# Altium PCB MCU.PcbDoc
Units mm, origin at the board's own origin, x right, y up, seen from the top; angles counter-clockwise.
Board outline 47.6 x 56 mm, 2 copper layers (Top Layer, Bottom Layer), stack 1.591 mm thick; 47 components, 57 nets, 217 pads, 69 vias.
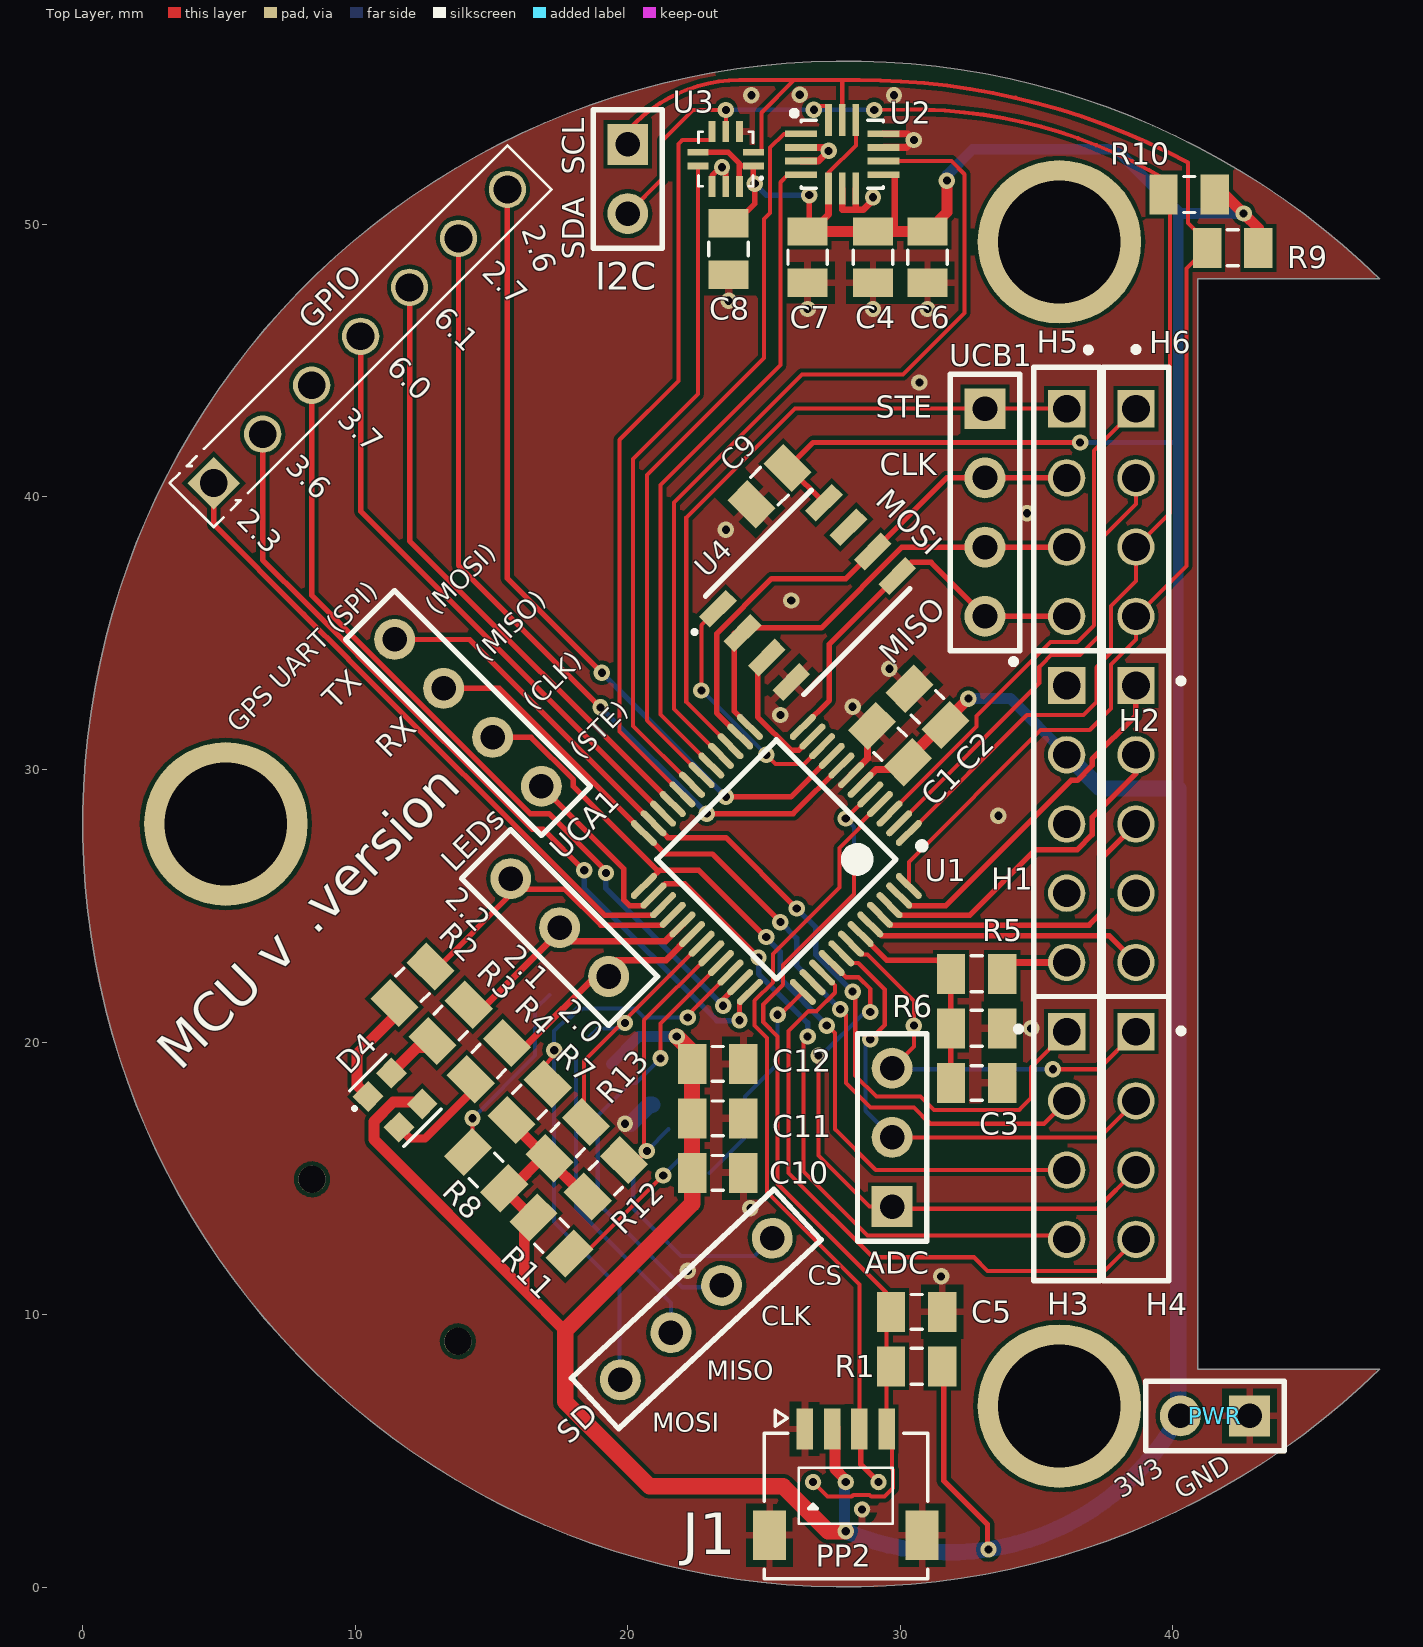
[diagram p0: Top Layer view]
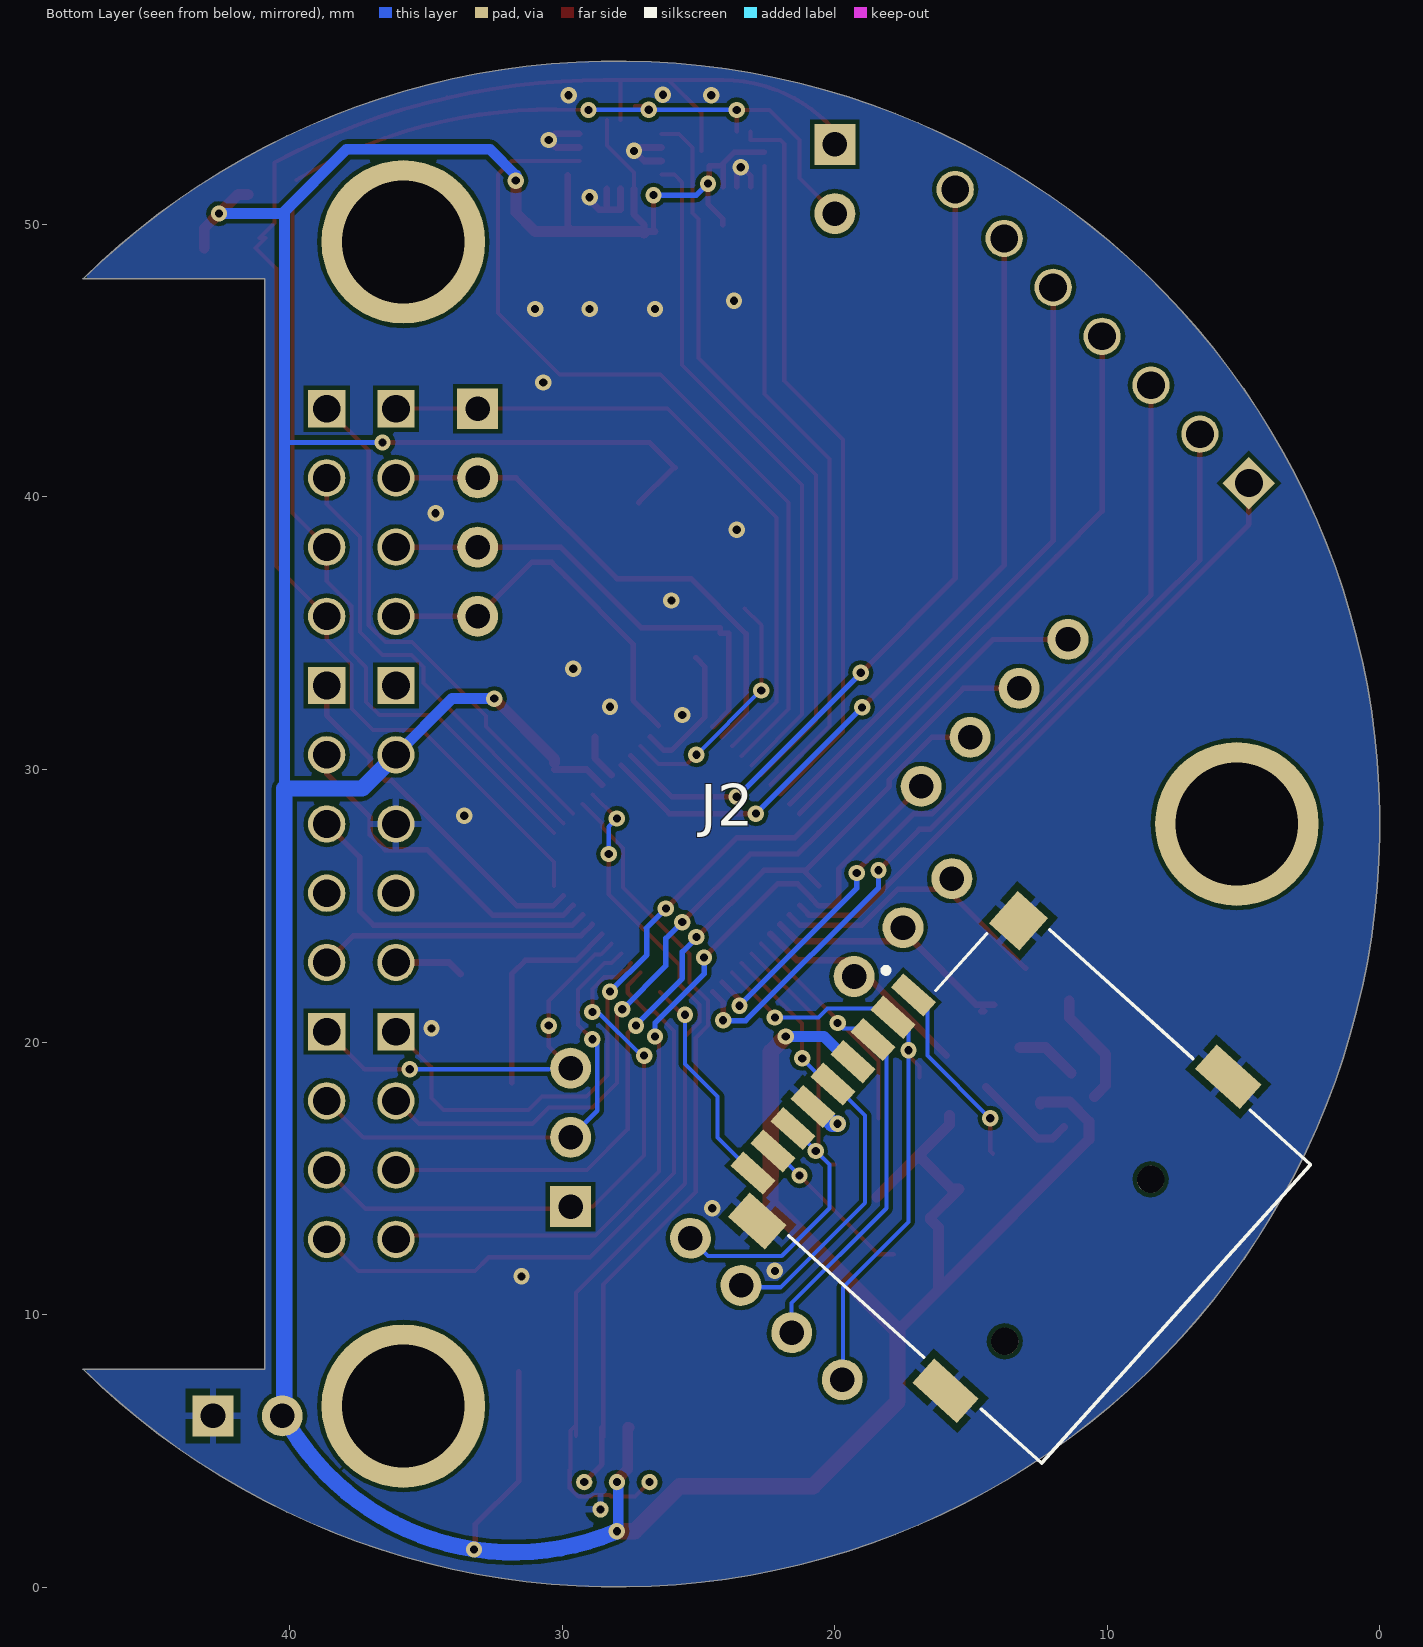
[diagram p1: Bottom Layer view, seen from below]
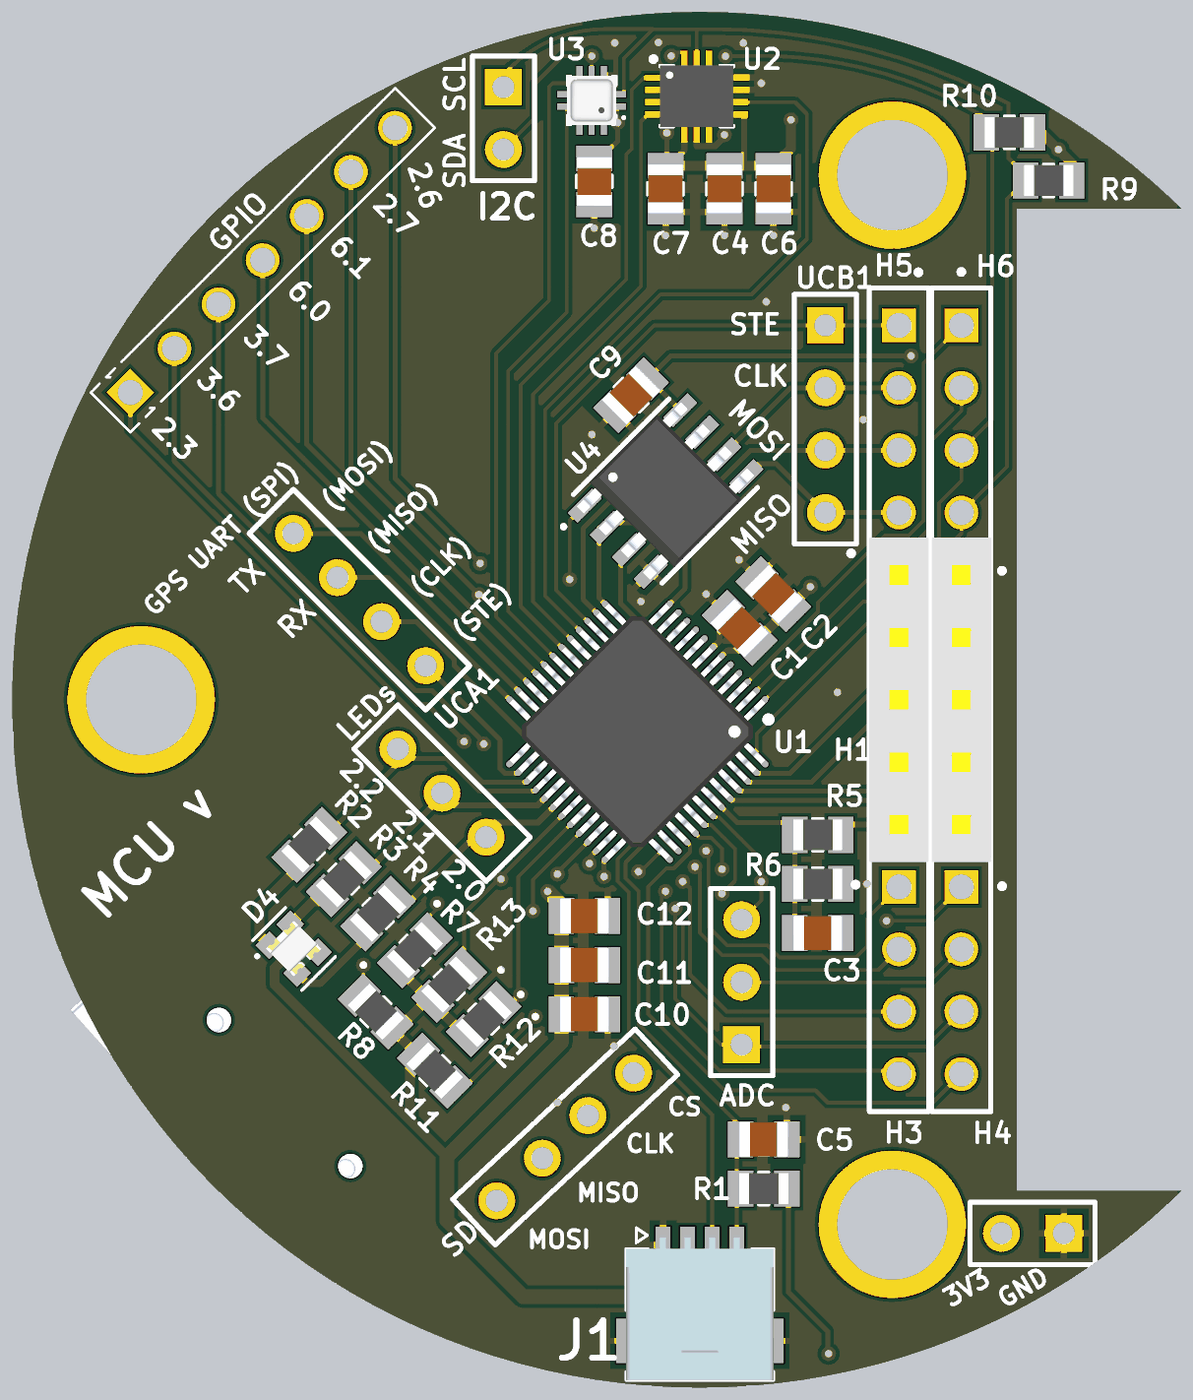
[diagram p2: 3D render of the assembled board from above, using the file's embedded part models]

## Layer stack, top to bottom
Top Solder: solder mask 0.0102, Solder Resist, Dk 3.5
Top Layer: signal copper 0.0356
Dielectric 1: dielectric 1.52, FR-4, Dk 4.8
Bottom Layer: signal copper 0.0356
Bottom Solder: solder mask 0.0102, Solder Resist, Dk 3.5

## Board outline
47.596,8 cw(c28,28) 47.596,48 47.6,48 40.913,48 40.913,8

## Design rules (kind name [scope] priority, off if disabled: settings)
Clearance [All] p1: gap=0.152 ignorepadtopadclearanceinfootprint=FALSE
HoleSize [All] p1: absolutevalues=TRUE maxlimit=6.2 minlimit=0.3 maxpercent=80.000 minpercent=20.000
MinimumAnnularRing [All] p1: minimumring=0.15
MinimumSolderMaskSliver [All] p1: minsoldermaskwidth=0.1
PolygonConnect ViaConnect [IsVia] p1: connectstyle=Direct reliefconductorwidth=0.254 reliefentries=4 polygonreliefangle="90 Angle" airgapwidth=0.254
PolygonConnect [All] p2: connectstyle=Relief reliefconductorwidth=0.254 reliefentries=4 polygonreliefangle="90 Angle" airgapwidth=0.254
RoutingVias [All] p1: holewidth=0.3 width=0.6 viastyle="Through Hole" minholewidth=0.3 minwidth=0.5 maxholewidth=1 maxwidth=5
SilkToSilkClearance [All] p1: silktosilkclearance=0.1
SilkToSolderMaskClearance [IsPad] p1: minsilkscreentomaskgap=0.1 clearancetoexposedcopper=TRUE
SolderMaskExpansion [All] p1: expansion=0.051 istentingtop=FALSE
Width [All] p1: maxlimit=25.4 minlimit=0.15 preferedwidth=0.3
26 further rules are at their usual default settings.

## Components (designator, comment, footprint, x,y, rotation, side; value= is the part's Value field where it differs from the comment)
ADC "Header 3" HDR1X3#1 29.7,13.96 r90 top
C1 "100nF" CAPACITOR_0805_2012M-70N 29.621,30.928 r315 top
C2 "22uF" CAPACITOR_0805_2012M-70N 31,32.3 r315 top
C3 "100nF" CAPACITOR_0805_2012M-70N 32.8,18.5 r180 top
C4 "0.1uF" CAPACITOR_0805_2012M-70N 29,48.8 r90 top
C5 "1nF" CAPACITOR_0805_2012M-70N 30.6,10.1 r180 top
C6 "2.2 uF" CAPACITOR_0805_2012M-70N 31,48.8 r90 top
C7 "10 nF" CAPACITOR_0805_2012M-70N 26.6,48.8 r90 top
C8 "0.1uF" CAPACITOR_0805_2012M-70N 23.7,49.1 r90 top
C9 "0.1uF" CAPACITOR_0805_2012M-70N 25.2,40.4 r45 top
C10 "22uF" CAPACITOR_0805_2012M-70N 23.3,15.2 r180 top
C11 "22uF" CAPACITOR_0805_2012M-70N 23.3,17.2 r180 top
C12 "22uF" CAPACITOR_0805_2012M-70N 23.3,19.2 r180 top
D4 "B38G3RGB-10D0003H2U1930" LED_B38G3RGB-10D0003H2U1930_0606_1616M 11.465,17.865 r45 top
GPIO "HDR,2.54mm,1x7" HEADER_2.54MM_1x7PIN 10.196,45.896 r45 top
H1 "SSQ-105-03-S-S" SAMTEC_SSQ-105-03-S-S 36.107,28 r270 top
H2 "SSQ-105-03-S-S" SAMTEC_SSQ-105-03-S-S 38.647,28 r270 top
H3 "SSQ-104-02-S-S" *SAMTEC_SSQ-104-02-S-S_SSQ-104-02-S-S(Primary) 36.107,16.57 r270 top
H4 "SSQ-104-02-S-S" *SAMTEC_SSQ-104-02-S-S_SSQ-104-02-S-S(Primary) 38.647,16.57 r270 top
H5 "SSQ-104-02-S-S" *SAMTEC_SSQ-104-02-S-S_SSQ-104-02-S-S(Primary) 36.107,39.43 r270 top
H6 "SSQ-104-02-S-S" *SAMTEC_SSQ-104-02-S-S_SSQ-104-02-S-S(Primary) 38.647,39.43 r270 top
I2C "" HDR1X2 20,52.94 r270 top
J1 "5015680407" MOLEX_5015680407 28,3.25 r0 top
J2 "MSD-4-A" CUI_MSD-4-A 12.869,14.869 r132 bottom
LEDs "Header 3" HDR1X3#2 15.704,25.996 r315 top
PP2 "Headerless Pogo Holes 4-pin" POGO_4_PIN_HEADER 28,3.35 r0 top
PWR "" HDR1X2 42.82,6.278 r180 top
R1 "47k" RESISTOR_0805_2012M-50N 30.6,8.1 r0 top
R2 "4.7k" RESISTOR_0805_2012M-50N 12.1,22.1 r225 top
R3 "4.7k" RESISTOR_0805_2012M-50N 13.5,20.7 r225 top
R4 "4.7k" RESISTOR_0805_2012M-50N 14.9,19.3 r225 top
R5 "47k" RESISTOR_0805_2012M-50N 32.8,22.5 r0 top
R6 "47k" RESISTOR_0805_2012M-50N 32.8,20.5 r180 top
R7 "4.7k" Resistor_0805_2012M-50N 16.397,17.8 r225 top
R8 "4.7k" Resistor_0805_2012M-50N 14.8,15.3 r315 top
R9 "4.7k" RESISTOR_0805_2012M-50N 42.2,49.139 r0 top
R10 "4.7k" RESISTOR_0805_2012M-50N 40.6,51.1 r0 top
R11 "4.7k" Resistor_0805_2012M-50N 17.2,12.9 r135 top
R12 "4.7k" Resistor_0805_2012M-50N 19.197,15 r225 top
R13 "4.7k" Resistor_0805_2012M-50N 17.797,16.4 r225 top
SD "Header 4" HDR1X4#1 19.727,7.603 r43 top (schematic designator UCA0)
U1 "MSP430FR2355TPT" PT0048A_L 25.452,26.7 r225 top
U2 "ICM-42670-P" XDCR_ICM-42670-P-EXTENDED_PADS 27.869,52.576 r0 top
U3 "BMP390" BMP390 23.595,52.4 r270 top
U4 "MX25V16066M1I02" "SOIC-8 MX25V16066M1I02" 26.6,36.5 r45 top
UCA1 "Header 4" HDR1X4#1 16.833,29.383 r135 top locked
UCB1 "Header 4" HDR1X4#2 33.109,43.24 r270 top

## Footprints (in the part's own frame and the unit in brackets; to place one, negate y for a bottom-side part, rotate by r counter-clockwise, add the part's x,y. Pads: shape width x height; smd on the part's side, far side on the other; paste and mask are expansions set on the pad)
*SAMTEC_SSQ-104-02-S-S_SSQ-104-02-S-S(Primary) [mm]
  rect 1.37x1.37 hole 1.02: 01(-3.81,0)
  round 1.37 hole 1.02: 02(-1.27,0) 03(1.27,0) 04(3.81,0)
  silkscreen extent -5.34,-1.87 5.34,1.2
BMP390 [mm]
  rect 0.25x0.775 smd: 1(0.25,1.013) 2(-0.25,1.013) 6(-0.25,-1.013) 7(0.25,-1.013)
  rect 0.775x0.25 smd: 3(-1.013,0.5) 4(-1.013,0) 5(-1.013,-0.5) 8(1.013,-0.5) 9(1.013,0) 10(1.013,0.5)
  silkscreen extent -1,-1 1,1.36, body extent -1,-1 1,1, height 0.8
CAPACITOR_0805_2012M-70N [mm] "Capacitor, 0805 (2012 metric), 0.7mm high, nominal pads,"
  rect 1.04x1.47 smd mask+0.051: 1(-0.94,0) 2(0.94,0)
  silkscreen extent -0.2,-0.63 0.2,0.63, body extent -1,-0.73 1,0.73, height 1.23
CUI_MSD-4-A [mm]
  rect 0.7x1.6 smd: 1(2.25,7.75) 2(1.15,7.75) 3(0.05,7.75) 4(-1.05,7.75) 5(-2.15,7.75) 6(-3.25,7.75) 7(-4.35,7.75) 8(-5.45,7.75) CD(-6.55,7.75)
  rect 1.2x1.8 smd: G1(-7.75,6.45)
  rect 1.6x1.5 smd: G2(6.85,6.7)
  rect 1.2x2.2 smd: G3(-7.75,-2.85) G4(7.75,-2.85)
  round 1 hole 1 unplated: ""(-4.95,-3.25) ""(3.05,-3.25)
  silkscreen extent -7.38,-7.25 7.37,9.2, body extent -8.05,-7.47 8.1,7.58, height 1.8
HDR1X2 [mm] "Connector; Header; 2 Position"
  rect 1.5x1.5 hole 0.9: 1(0,0)
  round 1.5 hole 0.9: 2(2.54,0)
  silkscreen extent -1.27,-1.27 3.81,1.27
HDR1X3#1 [mm] "Connector; Header; 3 Position"
  rect 1.5x1.5 hole 0.9: 1(0,0)
  round 1.5 hole 0.9: 2(2.54,0) 3(5.08,0)
  silkscreen extent -1.27,-1.27 6.35,1.27
HDR1X3#2 [mm] "Connector; Header; 3 Position"
  round 1.5 hole 0.9: 1(0,0) 2(2.54,0) 3(5.08,0)
  silkscreen extent -1.27,-1.27 6.35,1.27
HDR1X4#1 [mm] "Connector; Header; 4 Position"
  round 1.5 hole 0.9: 1(0,0) 2(2.54,0) 3(5.08,0) 4(7.62,0)
  silkscreen extent -1.27,-1.27 8.89,1.27
HDR1X4#2 [mm] "Connector; Header; 4 Position"
  rect 1.5x1.5 hole 0.9: 1(0,0)
  round 1.5 hole 0.9: 2(2.54,0) 3(5.08,0) 4(7.62,0)
  silkscreen extent -1.27,-1.27 8.89,1.27
HEADER_2.54MM_1x7PIN [mm]
  rect 1.37x1.37 hole 1.02: 1(-7.62,0)
  round 1.37 hole 1.02: 2(-5.08,0) 3(-2.54,0) 4(0,0) 5(2.54,0) 6(5.08,0) 7(7.62,0)
  silkscreen extent -8.76,-1.14 8.76,1.14
LED_B38G3RGB-10D0003H2U1930_0606_1616M [mm] "RGB LED, 0606 (1616 metric), 0.4mm high"
  rect 0.813x0.8 smd mask+0.051: 1(-0.602,0.8) 2(0.602,0.8) 3(0.602,-0.8) 4(-0.602,-0.8)
  silkscreen extent -1.3,-1.42 0.97,1.42, body extent -0.8,-0.8 0.8,0.8, height 0.4
MOLEX_5015680407 [mm] "Header - Picoclasp 04-pin, SMT, RA, 3.2mm height"
  rect 0.6x1.5 smd mask+0.076: 1(-1.5,2.55) 2(-0.5,2.55) 3(0.5,2.55) 4(1.5,2.55)
  rect 1.2x1.8 smd mask+0.076: MP1(2.8,-1.35) MP2(-2.8,-1.35)
  silkscreen extent -3,-2.95 3,3.25, body extent -3,-2.95 3,2.95, height 3.19
POGO_4_PIN_HEADER [mm] "4-pin header for pogo pins"
  round 0.6 hole 0.3 mask+0.051: 1(-1.2,0.5) 2(0,0.5) 3(0.6,-0.5) 4(1.2,0.5)
  silkscreen extent -1.73,-1.02 1.72,1.03
PT0048A_L [mm]
  oval 1.25x0.25 smd paste+0 mask+0.051: 1(-4.125,2.75) 2(-4.125,2.25) 3(-4.125,1.75) 4(-4.125,1.25) 5(-4.125,0.75) 6(-4.125,0.25) 7(-4.125,-0.25) 8(-4.125,-0.75) 9(-4.125,-1.25) 10(-4.125,-1.75) 11(-4.125,-2.25) 12(-4.125,-2.75) 25(4.125,-2.75) 26(4.125,-2.25) 27(4.125,-1.75) 28(4.125,-1.25) 29(4.125,-0.75) 30(4.125,-0.25) 31(4.125,0.25) 32(4.125,0.75) 33(4.125,1.25) 34(4.125,1.75) 35(4.125,2.25) 36(4.125,2.75)
  oval 0.25x1.25 smd paste+0 mask+0.051: 13(-2.75,-4.125) 14(-2.25,-4.125) 15(-1.75,-4.125) 16(-1.25,-4.125) 17(-0.75,-4.125) 18(-0.25,-4.125) 19(0.25,-4.125) 20(0.75,-4.125) 21(1.25,-4.125) 22(1.75,-4.125) 23(2.25,-4.125) 24(2.75,-4.125) 37(2.75,4.125) 38(2.25,4.125) 39(1.75,4.125) 40(1.25,4.125) 41(0.75,4.125) 42(0.25,4.125) 43(-0.25,4.125) 44(-0.75,4.125) 45(-1.25,4.125) 46(-1.75,4.125) 47(-2.25,4.125) 48(-2.75,4.125)
  silkscreen extent -4.25,-3.1 3.1,3.55, body extent -4.5,-4.5 4.5,4.5, height 1.6
RESISTOR_0805_2012M-50N [mm] "Resistor, 0805 (2012 metric), nominal pads"
  rect 1.04x1.47 smd mask+0.051: 1(-0.94,0) 2(0.94,0)
  silkscreen extent -0.2,-0.66 0.2,0.66, body extent -1,-0.63 1,0.62, height 0.5
Resistor_0805_2012M-50N [mm] "Resistor, 0805 (2012 metric), nominal pads"
  rect 1.04x1.47 smd mask+0.051: 1(-0.94,0) 2(0.94,0)
  silkscreen extent -0.2,-0.66 0.2,0.66, body extent -1,-0.62 1,0.63, height 0.5
SAMTEC_SSQ-105-03-S-S [mm]
  rect 1.37x1.37 / inner round 1.37 / far side rect 1.37x1.37 hole 1.02: 1(-5.08,0)
  round 1.37 hole 1.02: 2(-2.54,0) 3(0,0) 4(2.54,0) 5(5.08,0)
  silkscreen extent -6.36,-2.05 6.33,1.2, body extent -6.6,-1.21 6.6,1.21, height 8.51
"SOIC-8 MX25V16066M1I02" [mm] "SD Card, SPI, 8-SOP footprint"
  rect 1.4x0.57 smd mask+0.051: 1(-2.75,1.905) 2(-2.75,0.635) 3(-2.75,-0.635) 4(-2.75,-1.905) 5(2.75,1.905) 6(2.75,0.635) 7(2.75,-0.635) 8(2.75,-1.905)
  silkscreen extent -3.99,-2.55 2.75,2.55, body extent -3,-2.45 3,2.45, height 1.75
XDCR_ICM-42670-P-EXTENDED_PADS [mm]
  rect 1.175x0.25 smd paste-1 mask+0.05: 1(-1.512,0.75) 2(-1.512,0.25) 3(-1.512,-0.25) 4(-1.512,-0.75) 8(1.512,-0.75) 9(1.512,-0.25) 10(1.512,0.25) 11(1.512,0.75)
  rect 0.25x1.175 smd paste-1 mask+0.05: 5(-0.5,-1.262) 6(0,-1.262) 7(0.5,-1.262) 12(0.5,1.262) 13(0,1.262) 14(-0.5,1.262)
  silkscreen extent -1.86,-1.25 1.5,1.6, body extent -1.5,-1.25 1.5,1.25, height 0.81

## Part data
ADC LEDs: "Header, 3-Pin"
C1 C3: library part "Generic Capacitor", "Generic Capacitor", Capacitance at Rated Voltage=40%, MF Part No.=C0805C104K5RAC7800, Package=0805, Rated Voltage=50V, Supplier 1 Part No.=399-C0805C104K5RAC7800CT-ND, Temperature Coefficient=X7R, Temp Range="-55°C ~ 125°C", Tolerance=±10%, Supplier 1=Digikey
C2: library part C0805C226M9PACTU, "Passive - Capacitor, X5R, 22uF Max, 6.3V, 0805 (2012 Metric), ±20%, -55°C ~ 85°C. 8.8uF @ 5V", Capacitance at Rated Voltage=30%, Package=0402, Rated Voltage=6.3V, Supplier 1 Part No.=399-C0805C226M9PAC7800CT-ND, Temperature Coefficient=X5R, Temp Range="-55°C ~ 85°C", Tolerance=±20%, APSS Standard Part="APSS Standard", MF Part No.=C0805C226M9PACTU, Supplier 1=Digikey
C4 C6 C7 C8 C9: library part "Generic Capacitor", "Generic Capacitor", Capacitance at Rated Voltage=40%, MF Part No.=C0805C104K5RAC7800, Package=0805, Rated Voltage=50V, Supplier 1 Part No.=399-C0805C104K5RAC7800CT-ND, Temp Range="-55°C ~ 125°C", Temperature Coefficient=X7R, Tolerance=±10%, Supplier 1=Digikey
C5: library part "Generic Capacitor", "Generic Capacitor", Capacitance at Rated Voltage=100%, MF Part No.=399-C0805C102J5GAC7800CT-ND, Package=0805, Rated Voltage=50V, Temperature Coefficient=X7R, Temp Range="-55°C ~ 125°C", Tolerance=±5%, Supplier 1=Digikey, Supplier 1 Part No.=399-C0805C102J5GAC7800CT-ND
C10 C11 C12: library part GRM21BR61C226ME44L, "Passive - Capacitor, X5R, 22uF Max, 16V, 0805 (2012 Metric), ±20%, -55°C ~ 85°C. 9.4uF @ 5V, 3.2uF @ 15V, 1.9uF @ 25V", Capacitance at Rated Voltage=10%, Package=0805, Rated Voltage=16V, Supplier 1 Part No.=490-10747-1-ND, Temperature Coefficient=X5R, Temp Range="-55°C ~ 85°C", Tolerance=±20%, APSS Standard Part="APSS Standard", MF Part No.=GRM21BR61C226ME44L, Supplier 1=Digikey
D4: "Diode - LED, RGB, 2V Red, 3V Green, 3V Blue 0606 (1616 Metric)", Package=0606, Supplier 1 Part No.=3147-B38G3RGB-10D0003H2U1930CT-ND, Temp Range="-40°C ~ 85°C", APSS Standard Part="APSS Standard", MF Part No.=B38G3RGB-10D0003H2U1930, Supplier 1=Digikey
GPIO: "Connector - 2.54mm, 1x7-pin"
I2C PWR: library part "Header 2", "Header, 2-Pin"
J1: "Connector - Picoclasp  04-pin, SMT, RA", Supplier 1 Part No.=WM7895CT-ND, APSS Standard Part="APSS Standard", MF Part No.=5015680407, Mounting Type="Surface Mount", Orientation=Straight, Pins=4, Pitch=1mm, Supplier 1=Digikey
J2: "Micro SD Card Connector, 9 Positions, Connector and Ejector, Push In, Auto Eject Out, Surface Mount, 1.8 mm Height Above Board, Gold Flash", Package=None, Check_prices=https://www.snapeda.com/parts/MSD-4-A/Same+Sky/view-part/?ref=eda, MF="Same Sky", MP=MSD-4-A, SnapEDA_Link=https://www.snapeda.com/parts/MSD-4-A/Same+Sky/view-part/?ref=snap
R1 R6: library part "RMCF0805JT Series", "Passive - Resistor Series, 0805, 5%, 100m - 22M, E24, 0.063W, 1/16W, ±200ppm/°C, -55°C ~ 155°C, 0805 (2012 Metric)", MF Part No.=RMCF0805JT47K0, Package=0805, Power=1/8W, Rated Voltage=150V, Temp Range="-55°C ~ 155°C", Temperature Coefficient=±200ppm/°C, Tolerance=5%, Value Range="100m ~ 22M", APSS Standard Part="APSS Standard", E Series=E24, Supplier 1=Digikey
R2 R3 R4 R7 R8 R11 R12 R13: library part "RMCF0805JT Series", "Passive - Resistor Series, 0805, 5%, 100m - 22M, E24, 0.063W, 1/16W, ±200ppm/°C, -55°C ~ 155°C, 0805 (2012 Metric)", MF Part No.=RMCF0805JT1K00, Package=0805, Power=1/8W, Rated Voltage=150V, Temperature Coefficient=±200ppm/°C, Temp Range="-55°C ~ 155°C", Tolerance=5%, Value Range="100m ~ 22M", APSS Standard Part="APSS Standard", E Series=E24, Supplier 1=Digikey
R5: library part "RMCF0805JT Series", "Passive - Resistor Series, 0805, 5%, 100m - 22M, E24, 0.063W, 1/16W, ±200ppm/°C, -55°C ~ 155°C, 0805 (2012 Metric)", MF Part No.=RMCF0805JT147K0, Package=0805, Power=1/8W, Rated Voltage=150V, Temp Range="-55°C ~ 155°C", Temperature Coefficient=±200ppm/°C, Tolerance=5%, Value Range="100m ~ 22M", APSS Standard Part="APSS Standard", E Series=E24, Supplier 1=Digikey
R9 R10: library part "RMCF0805JT Series", "Passive - Resistor Series, 0805, 5%, 100m - 22M, E24, 0.063W, 1/16W, ±200ppm/°C, -55°C ~ 155°C, 0805 (2012 Metric)", MF Part No.=RMCF0805JT4K70, Package=0805, Power=1/8W, Rated Voltage=150V, Temperature Coefficient=±200ppm/°C, Temp Range="-55°C ~ 155°C", Tolerance=5%, Value Range="100m ~ 22M", APSS Standard Part="APSS Standard", E Series=E24, Supplier 1=Digikey
SD UCA1 UCB1: "Header, 4-Pin"
U1: library part MSP430FR2355IPT, Package=LQFP-48, Rated Voltage="1.8V ~ 3.6V", Supplier 1 Part No.=296-50260-ND, Temp Range="-40°C ~ 105°C (TA)", APSS Standard Part="APSS Standard", MF Part No.=MSP430FR2355TPT, Supplier 1=Digikey
U2: "IC - Inertial Management Unit: Accelerometer + Gyro + Temperature Sensor, 6 Axis, I2C / I3C / SPI Interfaces", Package=14-LGA, Rated Voltage=3.6V, Supplier 1 Part No.=1428-ICM-42670-PCT-ND, Temp Range="-40°C ~ 85°C", APSS Standard Part="APSS Standard", MF Part No.=ICM-42670-P, Supplier 1=Digikey
U3: "Digital Pressure Sensor", Package=LGA, Supplier 1 Part No.=828-BMP390CT-ND, Temp Range="-40°C ~ 85°C", APSS Standard Part="APSS Standard", MF Part No.=BMP390, Pins=10, Pressure Range="30 kPa ~ 125 kPa", Supplier 1=Digikey
U4: "Flash Memory, SPI, 80 MHz @ 1 I/O and 160 MHz equivalent @ 1I/2O", Package="150mil 8-SOP", Rated Voltage=3.6V, Supplier 1 Part No.=1092-MX25V16066M1I02-ND, Temp Range="-40°C ~ 85°C", APSS Standard Part="APSS Standard", MF Part No.=MX25V16066M1I02, Pins=8, Supplier 1=Digikey
H1 H2: MP=SSQ-105-03-S-S

## Free pads (board coordinates)
  round 6 hole 4.5: 1(5.25,28) 1(35.837,6.643) 1(35.837,49.357)

## Via types
v1: diameter 0.6, hole 0.3, Top Layer to Bottom Layer, tented both sides, 69 vias

## Nets (pads, with @x,y where several pads share a name; then routed paths per layer and width w, separated by ;. In a path a pad name is that pad's centre, name@x,y a point inside that pad or via, vN(x,y) a via of type N, cw(c..) or ccw(c..) an arc to the next point about the centre after c; other vN are vias at no path point)
1V8: H1.1
1V8_EN: H2.3 U1.45 | length 12.3
  Top Layer w0.2: U1.45 29.63,24.29 36.932,24.29 37.442,24.8 37.442,26.795 H2.3
1V8_PG: H2.1 U1.47 | length 13
  Top Layer w0.2: U1.47 30.337,24.997 31.664,24.997 36.269,29.603 36.495,29.603 37.044,30.152 37.044,30.382 38.647,31.985 H2.1
3V3: C1.2 C2.2 C4.2 C6.2 C7.2 C8.2 C9.2 C10.2 C11.2 C12.2 D4.3 H1.2 J1.2 J2.4 PP2.2 PWR.2 R1.2 R7.2 R8.2 R9.2 R10.2 R11.2 R12.2 R13.2 U1.6 U2.5 U2.8 U2.12 U3.1 U3.6 U3.10 U4.5 | length 196.8
  Top Layer w0.15: U2.5 27.369,51.9 28.369,52.9 U2.12
  Top Layer w0.2: U3.6 22.584,52.652 23.685,52.652 24.09,52.247 24.09,52.15 ; U3.10 24.09,51.391 24.09,52.15 ; C8.2@24.107,49.99 24.107,50.207 24.657,50.757 v1(24.657,51.5) 24.608,51.549 U3.1 24.09,52.15 ; C7.2 26.657,49.797 v1(26.657,51.076) ; U4.5 25.924,41.065 C9.2 26.8,42 v1(36.6,42) ; R1.2@31.6,7.9 31.6,3.9 33.2,2.3 v1@33.2,1.38
  Top Layer w0.25: C7.2 27,49.74 27,50 27.369,50.369 U2.5 ; U1.6 29.105,30 C1.2@30.3,30 ; C4.2@29.6,49.74 29.8,49.94 U2.8@29.8,51.8
  Top Layer w0.4: D4.3 12.456,17.796 11.396,17.796 10.682,17.082 10.682,16.418 16.2,10.9 ; R7.2@15.8,17.3 15.8,16.974 R13.2@16.937,15.837 ; R11.2@16.496,13.487 16.2,13.191 16.2,10.9 ; R11.2@16.5,13.554 15.577,14.477 15.441,14.613 15.713,14.613 R13.2@16.937,15.837 ; 17.7,9.4 16.2,10.9 ; R12.2@18.463,14.311 R13.2@16.937,15.837 ; v1(21.8,20.2) 21.8,20.1 22.358,19.542 C12.2@22.4,19.5 ; C10.2@22.36,15.06 C11.2 C12.2 ; C7.2@27,49.74 27,49.677 27.063,49.74 C4.2 29.6,49.74 C6.2 31.709,50.449 v1(31.709,51.609) ; J1.2@27.55,5.85 27.6,5.85 27.6,4.328 28,3.928 PP2.2 ; C1.2 30.286,30.386 v1(32.5,32.6) ; R10.2 41.9,51.1 v1(42.6,50.4) 43.14,49.86 R9.2
  Top Layer w0.6: v1(21.8,20.2) 22.358,19.642 22.358,19.542 22.358,19.2 22.358,17.2 C10.2@22.358,15.1 ; C10.2 22.36,15.06 22.36,14.06 17.7,9.4 17.7,6.8 20.8,3.7 25.7,3.7 27.35,2.05 v1(28,2.05)
  Bottom Layer w0.2: v1(24.657,51.5) 25.08,51.076 v1(26.657,51.076) ; v1(36.6,42) 40.2,42
  Bottom Layer w0.4: J2.4@19.4,19.2 20.4,20.2 v1(21.8,20.2) ; v1@27.948,2.102 27.948,3.798 PP2.2 ; v1@31.709,51.809 32.66,52.76 37.915,52.76 40.275,50.4 ; v1(32.5,32.6) 34.047,32.6 H1.2 ; PWR.2@40.2,6.358 PWR.2 ; 40.2,29.3 40.2,42 40.2,50.325 40.275,50.4 ; v1(42.6,50.4) 40.275,50.4
  Bottom Layer w0.6: v1@28.05,2.027 ccw(c31.784,10.892) PWR.2@40.244,6.314 ; H1.2 37.347,29.3 40.2,29.3 PWR.2@40.2,6.358
  other v1: 33.24,1.38
3V3_EN: H2.4
3V3_PG: H2.2 U1.46 | length 12.4
  Top Layer w0.2: U1.46 29.983,24.644 32.544,24.644 34.963,27.063 36.495,27.063 37.044,27.612 37.044,28.244 38.647,29.847 H2.2
5V: H1.4
5V_EN: H2.5 U1.44 | length 10.3
  Top Layer w0.2: U1.44 29.313,23.9 37.667,23.9 H2.5
ADC9: ADC.3 H4.01 U1.42 | length 14.7
  Top Layer w0.153: U1.42 28.589,23.209 28.797,23.209 30.5,21.506 v1(30.5,20.6) 30.5,19.84 ADC.3 ; v1(35.6,19) 37.267,19 H4.01
  Bottom Layer w0.153: 30.5,19 v1(35.6,19)
ADC10: ADC.2 H4.02 U1.41 | length 17.8
  Top Layer w0.153: U1.41 28.192,22.899 28.457,22.899 29.429,21.928 29.429,20.63 v1(28.899,20.1) ; ADC.2 37.307,16.5 H4.02
  Bottom Layer w0.153: v1(28.899,20.1) 28.721,19.922 28.721,17.479 ADC.2
ADC11: ADC.1 H4.03 U1.40 | length 22
  Top Layer w0.153: v1(27,19.5) 27,15.83 28.87,13.96 ADC.1 29.778,13.882 37.229,13.882 H4.03 ; U1.40 27.533,22.852 27.533,22.773 27.712,22.594 27.79,22.594 28.008,22.376 28.471,22.376 28.9,21.948 v1(28.9,21.1)
  Bottom Layer w0.153: v1(27,19.5) 27.1,19.5 28.7,21.1 v1(28.9,21.1)
GND: C1.1 C2.1 C3.1 C4.1 C5.1 C6.1 C7.1 C8.1 C9.1 C10.1 C11.1 C12.1 H1.3 J1.1 J1.MP1 J1.MP2 J2.6 J2.G1 J2.G2 J2.G3 J2.G4 PP2.3 PWR.1 R6.1 U1.7 U2.2 U2.3 U2.6 U2.7 U2.10 U2.11 U3.3 U3.8 U3.9 U4.4 | length 12.2
  Top Layer w0.2: U3.8 23.095,51.794 23.401,52.1 v1@23.409,52.1 ; v1@23.419,52.1 23.595,51.924 U3.9
  Top Layer w0.25: U2.3 26.996,52.326 v1(27.369,52.7) 27.243,52.826 U2.2 ; U2.6 27.869,50.537 28.369,50.537 ; U1.7 28.8,30.402 C1.1@28.8,31.2 ; U2.7 28.369,50.537 ; v1(29,51) 29,50.9 28.637,50.537 28.369,50.537 ; U2.10 30.226,52.826 v1(30.5,53.1) 30.274,53.326 U2.11
  Bottom Layer w0.6: v1(19.9,17) 20.1,17 20.8,17.7 J2.6@20.9,17.7
  other v1: 31.5,11.4 22.2,11.6 24.5,13.9 34.8,20.5 33.6,28.3 25.6,32 28.252,32.3 29.6,33.7 26,36.2 23.6,38.8 34.652,39.4 30.7,44.2 26.6,46.9 29,46.9 31,46.9 23.7,47.2 23.457,52.1 24.535,54.74 29.77,54.74 26.31,54.76
GPIO2.3: GPIO.1 U1.27 | length 24.2
  Top Layer w0.2: GPIO.1 4.808,38.994 8.108,35.694 8.109,35.694 9.738,34.065 9.738,34.064 18.247,25.555 18.247,25.553 19.156,24.644 20.944,24.644 21.004,24.704 U1.27@20.992,24.716 ; U1.27@20.919,24.657 20.926,24.65 U1.27@20.992,24.716 ; U1.27 U1.27@20.992,24.716
GPIO2.6: GPIO.7 U1.9 | length 30.1
  Top Layer w0.2: GPIO.7 15.584,37.016 v1(19.05,33.55) ; v1(23.6,29) 25.983,29 U1.9
  Bottom Layer w0.2: v1(19.05,33.55) v1(23.6,29)
GPIO2.7: GPIO.6 U1.8 | length 30.6
  Top Layer w0.2: GPIO.6 13.788,37.492 v1(19,32.28) ; v1(22.9,28.38) 26.07,28.38 U1.8
  Bottom Layer w0.2: v1(19,32.28) v1(22.9,28.38)
GPIO3.4: U1.38
GPIO3.6: GPIO.2 U1.36 | length 30.7
  Top Layer w0.2: GPIO.2 6.604,37.696 8.254,36.046 8.255,36.046 10.091,34.211 10.091,34.21 16.5,27.8 16.9,27.8 v1(18.4,26.3) ; v1(24.1,20.8) 24.1,21.46 U1.36
  Bottom Layer w0.2: v1(18.4,26.3) 18.4,25.652 23.271,20.781 24.081,20.781 v1(24.1,20.8)
GPIO3.7: GPIO.3 U1.35 | length 30.7
  Top Layer w0.2: 8.4,36.399 GPIO.3 ; 8.4,36.4 10.443,34.357 10.443,34.356 16.418,28.38 17.101,28.38 19.2,26.281 v1(19.2,26.2) v1@19.2,26.068 ; v1(23.5,21.333) 23.5,21.567 U1.35
  Bottom Layer w0.2: v1(19.2,26.2) 19.2,25.633 v1(23.5,21.333)
GPIO5.4: H4.04 U1.39 | length 23.1
  Top Layer w0.153: U1.39 27.6,22.077 27.6,21.808 26.924,21.132 26.632,21.132 25.9,20.4 25.9,15.192 28.992,12.1 32.7,12.1 33.2,11.6 37.487,11.6 H4.04
GPIO6.0: GPIO.4 U1.22 | length 22.1
  Top Layer w0.2: GPIO.4 10.196,39.481 11.875,37.802 17,32.677 U1.22
GPIO6.1: GPIO.5 U1.21 | length 23
  Top Layer w0.2: GPIO.5 11.992,38.392 U1.21
LED_BLUE: LEDs.2 R3.1 U1.29 | length 9.1
  Top Layer w0.25: R3.1 14.804,21.365 LEDs.2@17.27,23.83 ; R3.1@14.529,21.129 R3.1@14.629,21.129 ; LEDs.2@17.4,23.7 21.391,23.7 U1.29
LED_GREEN: LEDs.1 R2.1 U1.28 | length 11.3
  Top Layer w0.2: R2.1@13,22.7 15.704,25.404 LEDs.1 ; LEDs.1@15.7,26.038 16.138,25.6 17.702,25.6 19.011,24.29 21.29,24.29 21.668,24.668 U1.28
LED_RED: LEDs.3 R4.1 U1.30 | length 8.3
  Top Layer w0.25: R4.1@15.9,19.5 19.4,23 21.398,23 U1.30
NetD4_1: D4.1 R2.2 | length 4.2
  Top Layer w0.4: D4.1 10.065,18.413 10.065,19.565 11.4,20.9 R2.2@11.4,21.5
NetD4_2: D4.2 R3.2 | length 2.3
  Top Layer w0.4: D4.2 12.269,19.8 R3.2@13.2,19.8
NetD4_4: D4.4 R4.2 | length 3.8
  Top Layer w0.3: D4.4 12.015,16.462 12.562,16.462 R4.2@14.45,18.35
NetJ2_1: J2.1 R8.1 | length 7
  Top Layer w0.15: R8.1@14.2,15.9 14.3,16 v1(14.3,17.2)
  Bottom Layer w0.15: v1(14.3,17.2) 16.6,19.5 16.6,21.204 J2.1
NetJ2_8: J2.8 R11.1 | length 5.9
  Top Layer w0.15: R11.1@17.841,12.213 18.413,12.213 v1(21.3,15.1)
  Bottom Layer w0.15: v1(21.3,15.1) J2.8@22.197,15.997
"P1.4 / SD_CS": J2.2 R7.1 SD.1 U1.34 | length 23.2
  Top Layer w0.15: R7.1@16.9,18.7 16.9,19.1 17.3,19.5 v1(17.3,19.7) ; v1(22.2,20.9) 22.2,20.974 U1.34
  Bottom Layer w0.15: J2.2@17.9,21 18.2,21.3 J2.2@18.273,21.227 ; J2.2@18.3,21.2 J2.2@18.273,21.227 ; SD.1@19.7,7.6 19.7,11 17.3,13.4 v1(17.3,19.7) 17.3,20.4 17.8,20.9 17.9,20.9 18.227,21.227 J2.2@18.273,21.227 ; v1(22.2,20.9) 20.6,20.9 20.273,21.227 J2.2@18.273,21.227
"P2.4 / FlashWP": U1.11 U4.3 | length 5
  Top Layer w0.2: U4.3 24.767,33.769 24.767,31.933 26,30.7 26.269,30.7 U1.11
"P2.5 / FlashCS": U1.10 U4.1 | length 9.1
  Top Layer w0.15: v1(22.7,32.9) 22.7,35.294 U4.1 ; v1(25.084,30.54) 25.424,30.2 26.476,30.2 U1.10
  Bottom Layer w0.15: v1(22.7,32.9) 22.724,32.9 v1(25.084,30.54)
"P3.5 / SD_CardDetect": J2.CD U1.37 | length 8.1
  Top Layer w0.15: v1(25.5,21) 25.585,21 U1.37
  Bottom Layer w0.15: J2.CD@23,15.2 24.3,16.5 24.3,18 25.5,19.2 v1(25.5,21)
"P6.2 / BMP_ADR": U1.20 U3.5 | length 27.3
  Top Layer w0.15: U1.20 19.7,31.392 19.7,42.1 21.857,44.257 21.857,52.957 22,53.1 23.095,53.1 U3.5
"P6.3 / BMP_INT": U1.19 U3.7 | length 24.6
  Top Layer w0.15: U1.19 20.196,31.603 20.196,41.396 22.582,43.782 U3.7
"P6.4 / IMU_ADR": U1.18 U2.1 | length 27.1
  Top Layer w0.15: U1.18 20.7,31.806 20.7,40.8 25,45.1 25,50.2 25.223,50.423 25.223,52.823 25.726,53.326 U2.1
"P6.5 / IMU_INT1": U1.17 U2.4 | length 24.9
  Top Layer w0.15: U1.17 21.2,32.013 21.2,40.442 25.607,44.848 25.607,51.55 25.883,51.826 U2.4
"P6.6 / IMU_INT2": U1.16 U2.9 | length 31.8
  Top Layer w0.15: U1.16 21.7,32.22 21.7,39.8 26.4,44.5 30.1,44.5 32.357,46.757 32.357,51.843 31.874,52.326 U2.9
Reset/SBW_TDIO: C5.2 J1.4 PP2.1 R1.1 U1.5 | length 33
  Top Layer w0.152: PP2.1 27.329,3.321 28.219,3.321 28.276,3.379 28.876,3.379 28.933,3.321 29.419,3.321 29.729,3.631 29.729,4.298 29.7,4.326 29.7,5.75 J1.4@29.5,5.95 ; v1(28,28.2) 28.887,29.087 U1.5 ; v1(28.3,26.9) 28.3,25.421 25.7,22.821 25.7,22.1 24.971,21.371 24.971,20.729 25.5,20.2 25.5,14.8 29.5,10.8 J1.4 J1.4@29.5,5.55
  Bottom Layer w0.152: v1(28,28.2) 28.3,27.9 v1(28.3,26.9)
SBW_TCK: J1.3 PP2.4 U1.4 | length 29
  Top Layer w0.152: J1.3@28.5,5.5 28.5,11.1 25.825,13.775 25.104,14.496 25.104,20.152 24.657,20.6 24.657,21.516 25.329,22.188 25.329,23.229 27.771,25.671 27.771,27.119 28.529,27.876 28.529,28.01 U1.4
  Top Layer w0.2: J1.3@28.55,5.85 28.55,4.5 PP2.4
SD_CLK: J2.5 SD.3 U1.33 | length 16.7
  Top Layer w0.15: v1(21.2,19.4) 21.2,20.681 U1.33
  Bottom Layer w0.15: v1(21.2,19.4) 20.3,18.5 20.1,18.5 18.9,17.3 18.9,14.1 22,11 23.4,11 23.442,11.042 SD.3
SD_MISO: J2.7 R12.1 SD.4 U1.32 | length 18.8
  Top Layer w0.15: R12.1@20,15.5 20.2,15.5 20.6,15.9 20.6,20.8 23.053,23.253 U1.32
  Bottom Layer w0.15: J2.7@21.5,16.8 v1(20.7,16) 20.2,15.5 20.2,13.9 21.95,12.15 24.65,12.15 25.1,12.6 SD.4@25.5,12.6
SD_MOSI: J2.3 R13.1 SD.2 U1.31 | length 21.7
  Top Layer w0.15: R13.1@18.4,17.2 18.4,19.295 U1.31
  Bottom Layer w0.15: J2.3@18.1,19.7 18.1,13.9 21.585,10.415 SD.2 ; J2.3@18.6,20.2 18.9,20.5 19.7,20.5 v1(19.9,20.7) ; v1@20,20.646 v1@19.923,20.723 ; v1(19.9,20.7) v1@19.923,20.723 ; v1(19.9,20.7) 19.9,20.746 v1@19.923,20.723
UCA1_CLK: H3.03 U1.25 UCA1.2 | length 31.2
  Top Layer w0.15: v1(27.3,20.6) 27.331,20.6 27.6,20.331 27.6,16.8 29.1,15.3 H3.03
  Top Layer w0.2: UCA1.2 16.455,31.179 18,29.634 18,29.38 21.121,26.259 20.931,26.069 20.9,26.038 U1.25 ; 21.141,26.279 21.157,26.295 22.609,26.295 25.052,23.852 v1(25.084,23.852)
  Bottom Layer w0.2: v1(25.084,23.852) 25.084,23.821 25.6,23.304 25.6,22.331 27.3,20.631 v1(27.3,20.6)
UCA1_RX/MISO: H3.02 U1.24 UCA1.3 | length 31.9
  Top Layer w0.15: v1(27.8,21.2) 28.002,20.998 28.002,18.498 28.9,17.6 30.5,17.6 31.1,17 35.267,17 H3.02
  Top Layer w0.2: UCA1.3 15.288,32.975 U1.24 21.363,26.9 23.104,26.9 v1@25.602,24.402
  Bottom Layer w0.2: v1(25.6,24.4) 26.2,23.8 26.2,22.8 v1(27.8,21.2)
UCA1_STE: H3.04 U1.26 UCA1.1 | length 31.2
  Top Layer w0.15: v1(26.6,20.2) 26.448,20.048 26.448,15.247 28.791,12.904 35.963,12.904 H3.04
  Top Layer w0.2: UCA1.1 19.859,26.357 19.859,25.218 20.08,24.997 20.597,24.997 U1.26@20.858,25.258 ; U1.26@20.881,25.319 20.888,25.319 U1.26 21.369,25.8 22.1,25.8 v1(24.8,23.1)
  Bottom Layer w0.2: v1(24.8,23.1) 24.8,22.5 26.6,20.7 v1(26.6,20.2)
UCA1_TX/MOSI: H3.01 U1.23 UCA1.4 | length 36
  Top Layer w0.15: v1(28.252,21.848) 28.348,21.752 28.348,20.33 28.346,20.329 28.346,18.775 29.121,18 30.748,18 31.235,17.513 34.365,17.513 34.8,17.948 34.8,19.073 H3.01
  Top Layer w0.2: UCA1.4 14.199,34.771 U1.23 21.47,27.5 23.6,27.5 v1(26.2,24.9)
  Bottom Layer w0.2: v1(26.2,24.9) 26.917,24.183 26.9,24.166 26.9,23.2 v1(28.252,21.848)
UCB0_CLK: H6.02 U1.2 | length 16.9
  Top Layer w0.15: U1.2 35.1,33.167 35.1,33.765 35.194,33.859 35.535,34.2 36.594,34.2 37.432,35.039 37.432,38.532 38.647,39.747 H6.02
UCB0_SCL/MISO: H6.04 I2C.1 R9.1 U1.48 U2.13 U3.2 | length 59.3
  Top Layer w0.15: I2C.1@19.764,53.158 cw(c24.132,49.783) 24.1,55.302 26.1,55.302 26.1,55.3 ; U3.2@24.9,52.7 24.9,54.1 26.1,55.3 ; U2.13 27.869,55.3 ; U1.48 30.313,26.613 35.152,31.452 36.952,31.452 37.735,32.235 37.735,33.859 38.647,34.772 H6.04 40.5,37.473 40.5,48.379 R9.1 40.899,49.5 41.114,49.5 40.563,50.052 40.563,52.271 ccw(c28.496,29.751) 30.033,55.254 ccw(c28.5,29.751) 28.5,55.3 27.869,55.3 ; 26.1,55.3 27.869,55.3
UCB0_SDA/MOSI: H6.03 I2C.2 R10.1 U1.1 U2.14 U3.4 | length 52.7
  Top Layer w0.15: I2C.2 21.3,51.7 21.3,53.1 22.4,54.2 v1(23.6,54.2) 23.6,53.418 U3.4 ; v1(26.83,54.21) 26.97,54.35 27.34,54.35 U2.14@27.34,54.2 ; v1@29.184,54.2 30.206,54.213 ; 30.212,54.215 cw(c30.445,36.144) R10.1@39.752,51.635 ; U1.1 34.64,32 36.718,32 37.2,32.482 37.2,33.752 37.735,34.287 37.735,35.998 38.647,36.91 H6.03 39.9,39.413 39.9,50.86 R10.1
  Bottom Layer w0.15: v1(23.6,54.2) 23.61,54.21 v1(26.83,54.21) 29.032,54.21 v1(29.042,54.2)
UCB0_STE: H6.01 U1.3 | length 19.2
  Top Layer w0.15: U1.3 32.804,31.578 32.804,31.967 35.52,34.683 36.495,34.683 37.105,35.292 37.105,41.698 H6.01
UCB1_CLK: H5.02 U1.14 U4.7 UCB1.2 | length 19.3
  Top Layer w0.2: U1.14 23.258,32.077 23.258,34.978 25.279,37 28,37 31.7,40.7 UCB1.2 H5.02
UCB1_MISO/SCL: H5.04 U1.12 U4.8 UCB1.4 | length 14.1
  Top Layer w0.2: U1.12@26.471,31.612 27.4,32.54 27.4,34.606 U4.8 30.394,37.6 31.129,37.6 UCB1.4 H5.04
UCB1_MOSI/SDA: H5.03 U1.13 U4.2 UCB1.3 | length 17.3
  Top Layer w0.2: U1.13 23.9,32.141 23.9,35.004 U4.2 24.206,35.2 27.1,35.2 30.06,38.16 UCB1.3 H5.03
UCB1_STE: H5.01 U1.15 UCB1.1 | length 24.7
  Top Layer w0.15: U1.15 23.764,30.855 22.148,32.471 22.148,39.248 26.14,43.24 UCB1.1 H5.01
Vbat: H1.5 R5.2 | length 2.5
  Top Layer w0.25: R5.2 34.16,22.92 H1.5
Vbat/2: C3.2 R5.1 R6.2 U1.43 | length 7.9
  Top Layer w0.2: U1.43 29.506,23 31.36,23 R5.1 R6.2 C3.2
pads on no net: J2. U4.6

## Polygon pours and split planes (outlines as drawn)
GND on Top Layer "Top GND" (solid, remove dead copper, pour order 5): 47.596,8 cw(c28,28) 47.596,48 47.6,48 40.913,48 40.913,8
GND on Bottom Layer "Bottom GND" (solid, remove dead copper, pour order 6): 47.596,8 cw(c28,28) 47.596,48 47.6,48 40.913,48 40.913,8

## Silkscreen, mask and mechanical layers (free items; w line width, h text height)
Top Overlay:
  text "SCL" at 18.4,51.826 h0.8 r90
  text "2.6" at 16.1,49.8 h0.8 r288.95
  text "SDA" at 18.4,48.7 h0.8 r90
  text "2.7" at 14.6,48.2 h0.8 r315
  text "6.1" at 12.8,46.5 h0.8 r315
  text "6.0" at 11.1,44.7 h0.8 r315
  text "STE" at 29.1,42.9 h0.8
  text "3.7" at 9.3,42.8 h0.8 r315
  text "3.6" at 7.4,41.065 h0.8 r315
  text "CLK" at 29.252,40.8 h0.8
  text "MOSI" at 29.042,39.8 h0.8 r315
  text "2.3" at 5.6,39.1 h0.8 r315
  text "(MOSI)" at 12.969,35.627 h0.7 r45
  text "(MISO)" at 14.805,33.897 h0.7 r45
  text "MISO" at 29.7,33.8 h0.8 r45
  text "TX" at 9.284,32.156 h0.8 r45
  text "(CLK)" at 16.57,32.113 h0.7 r45
  text "GPS UART (SPI)" at 5.701,31.318 h0.7 r45
  text "RX" at 11.23,30.381 h0.8 r45
  text "(STE)" at 18.298,30.323 h0.7 r45
  text "2.2" at 13.241,25.2 h0.8 r315
  text ".version" at 8.53,23.89 h1.4 r45
  text "2.1" at 15.4,23.1 h0.8 r315
  text "2.0" at 17.4,21.1 h0.8 r315
  text "MCU v" at 3.579,18.899 h1.4 r45
  text "CS" at 26.6,11.1 h0.7
  text "CLK" at 24.9,9.6 h0.7
  text "MISO" at 22.9,7.6 h0.7
  text "MOSI" at 20.9,5.7 h0.7
  text "3V3" at 38.112,3.238 h0.7 r30
  text "GND" at 40.309,3.204 h0.7 r30
3D Models:
  text "Battery cutout" at 46.172,24.284 h1.52 r90
Board Outline:
  the board outline again, w0.1
Courtyard:
  lines w0.254: 41.46,9.025 49.46,9.025 49.46,47.025 41.46,47.025 41.46,9.025